# Altium PCB power_interface.PcbDoc
Units mm, origin at the board's own origin, x right, y up, seen from the top; angles counter-clockwise.
Board outline 152.4 x 101.6 mm, 2 copper layers (Top Layer, Bottom Layer), stack 1.57 mm thick; 154 components, 221 nets, 602 pads, 0 vias.
Unrouted connection lines stored in the file: 326.
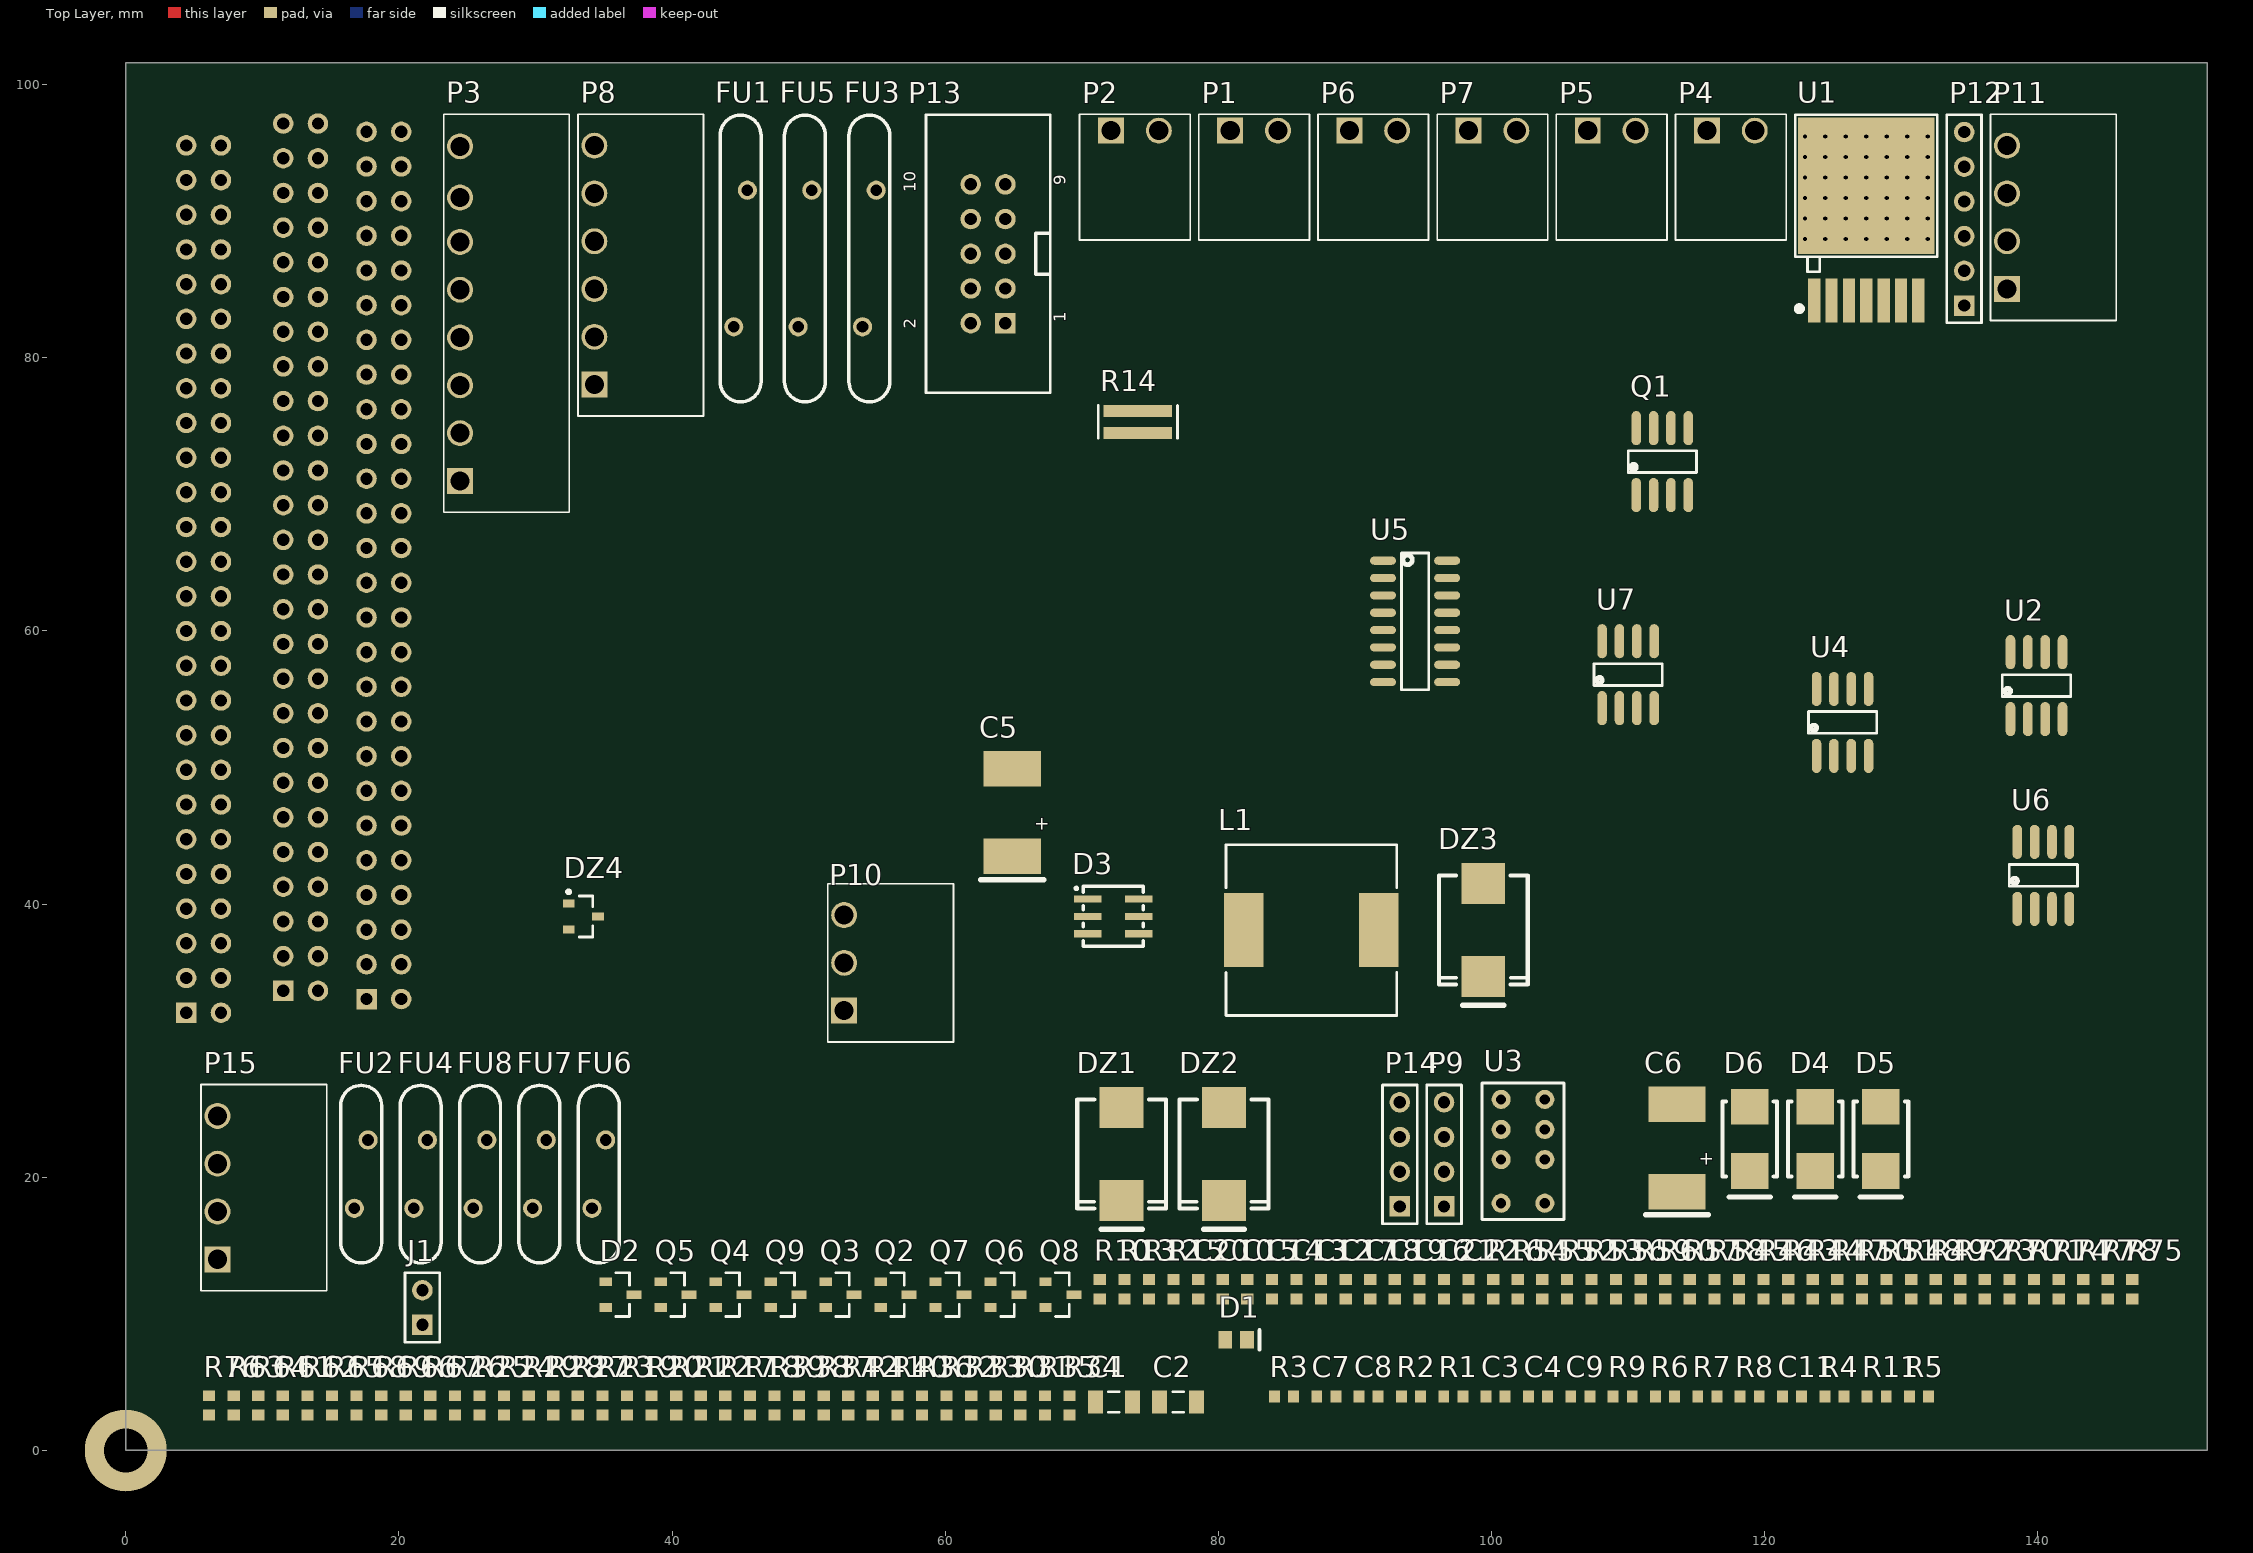
[diagram p0: Top Layer view]
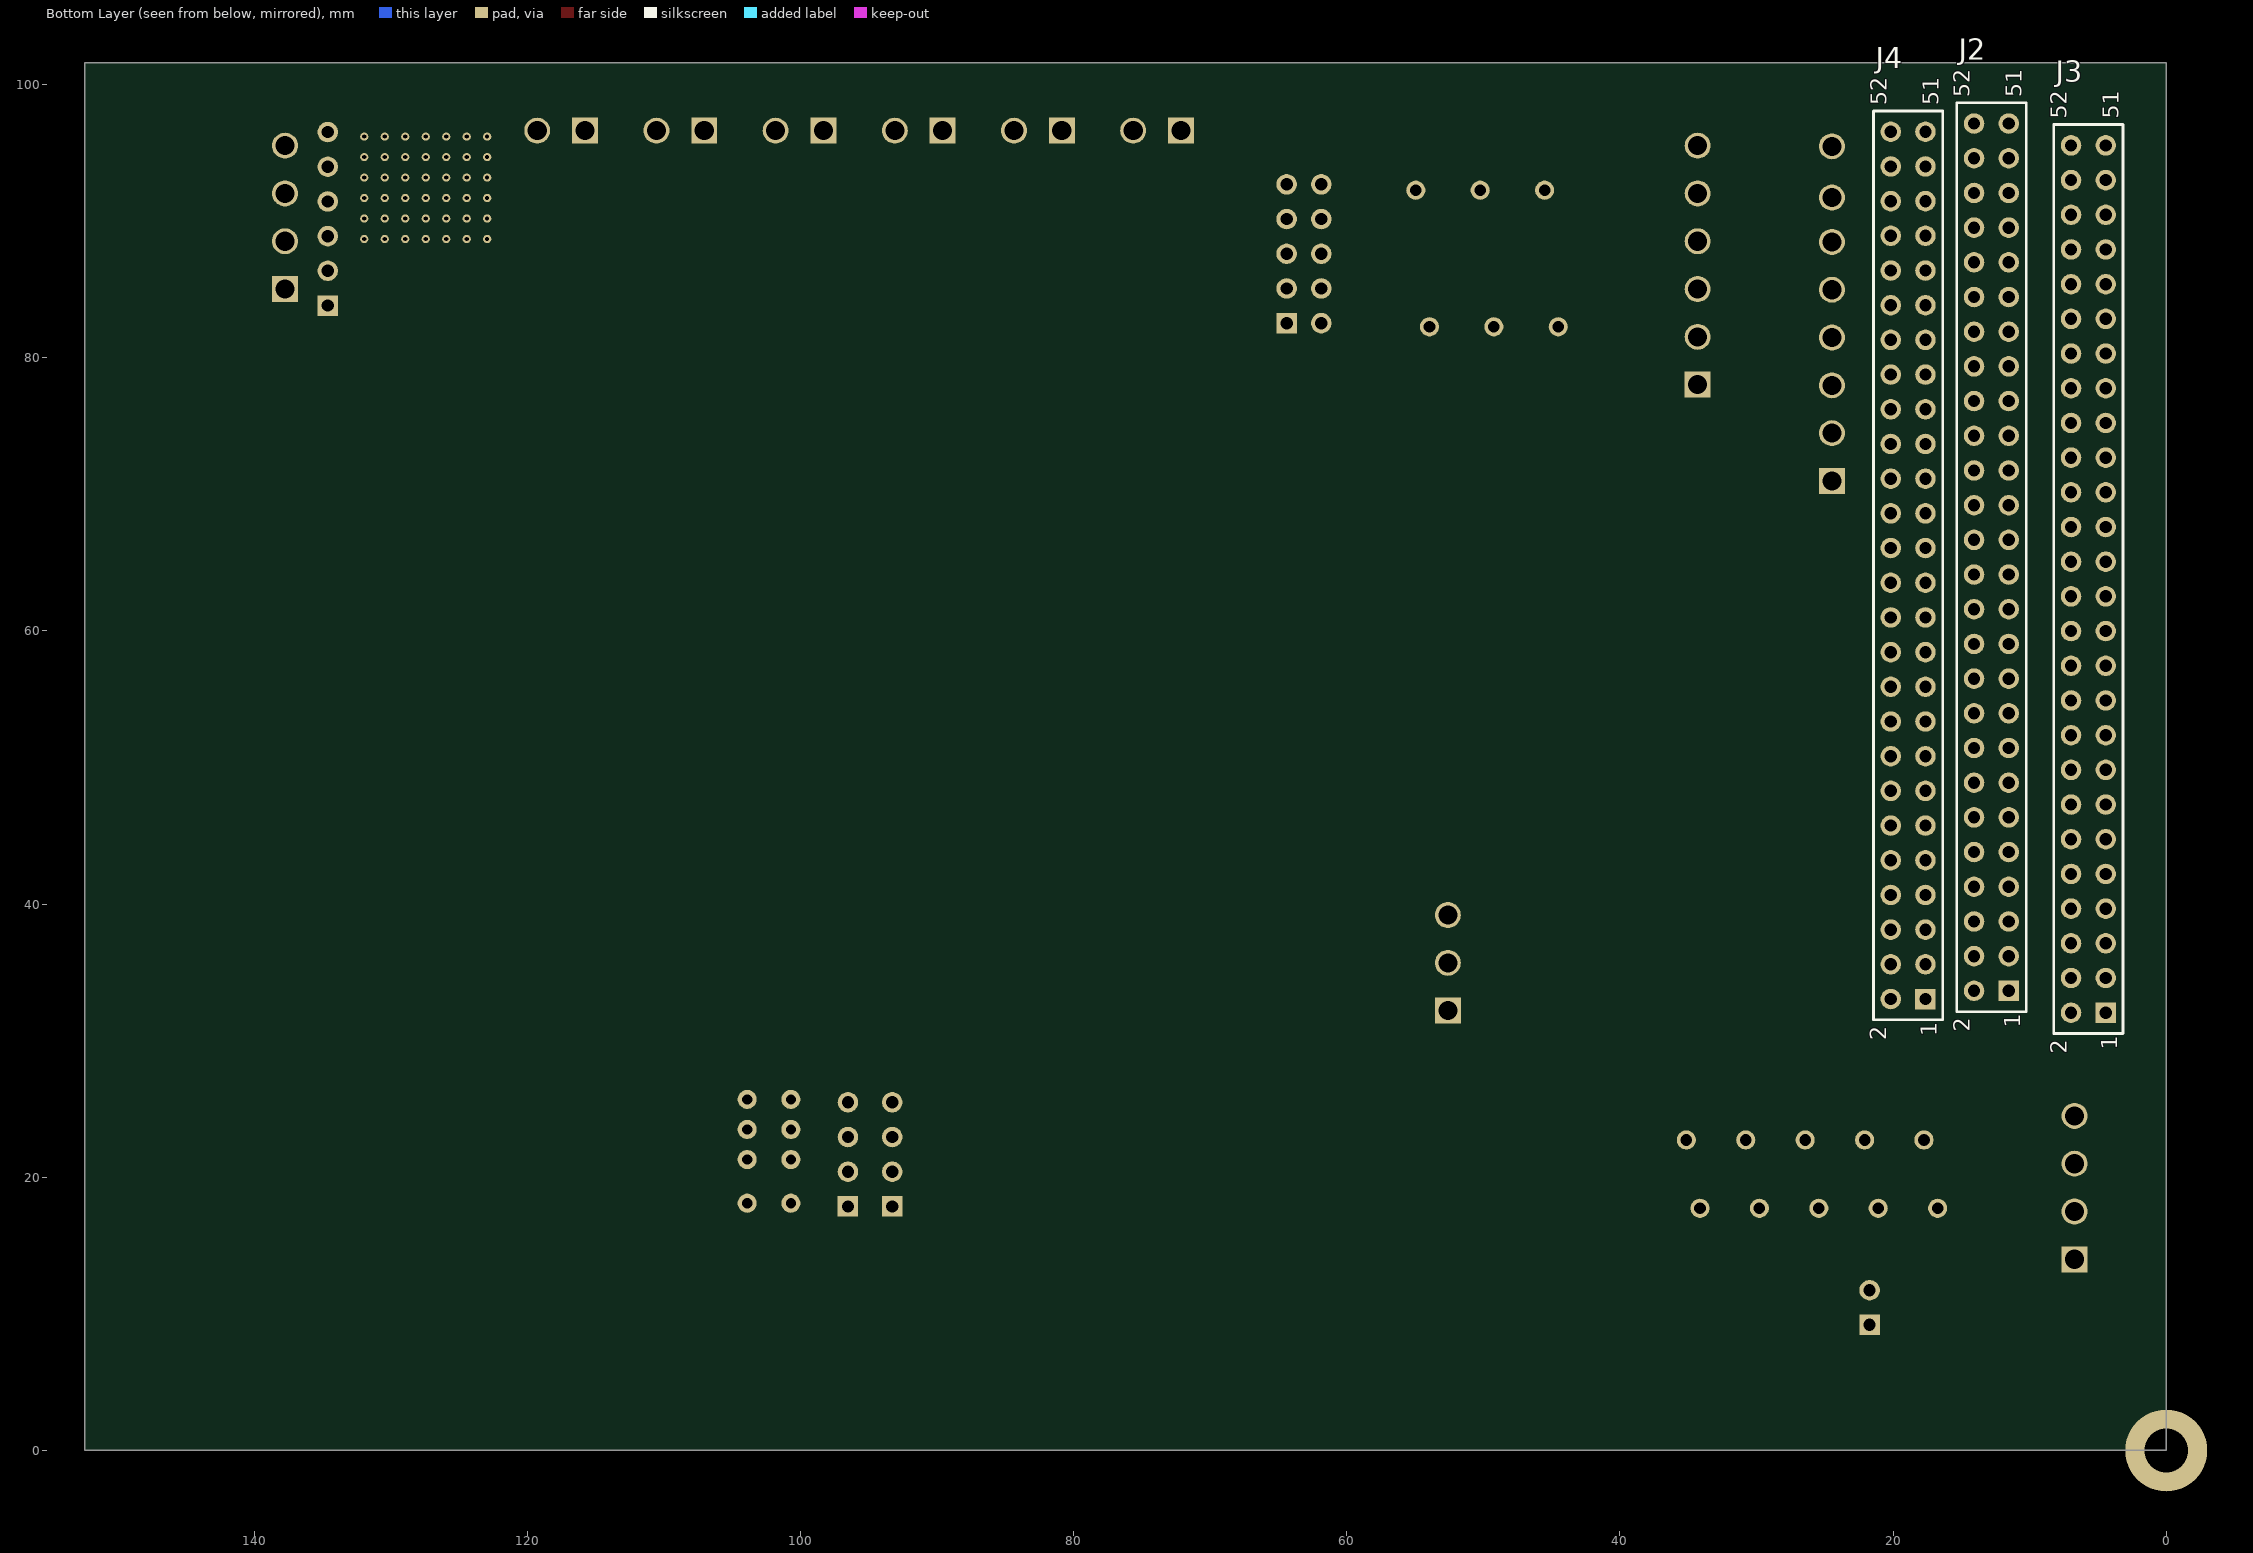
[diagram p1: Bottom Layer view, seen from below]

## Layer stack, top to bottom
Top Solder: solder mask 0.0102, Solder Resist, Dk 3.5
Top Layer: signal copper 0.035
Dielectric1: core 1.5, FR-4, Dk 4.2
Bottom Layer: signal copper 0.035
Bottom Solder: solder mask 0.0102, Solder Resist, Dk 3.5

## Board outline
0,0 152.4,0 152.4,101.6 0,101.6

## Design rules (kind name [scope] priority, off if disabled: settings)
Clearance [All] p1: gap=0.25
ComponentClearance [All] p1: gap=0.25 collisioncheckmode=3 verticalgap=0.25 showdistances=FALSE
HoleSize [All] p1: absolutevalues=TRUE maxlimit=10 minlimit=0.2 maxpercent=80.000 minpercent=20.000
HoleToHoleClearance [All] p1: gap=0.25 allowstackedmicrovias=TRUE
MinimumSolderMaskSliver [All] p1: minsoldermaskwidth=0.15
PlaneClearance [All] p1: clearance=0.5
PlaneConnect PlaneConnect_via [isvia] p1: planeconnectstyle=Direct reliefexpansion=0.508 reliefentries=4 reliefconductorwidth=0.254 reliefairgap=0.254
PlaneConnect [All] p2: planeconnectstyle=Relief reliefexpansion=0.6 reliefentries=4 reliefconductorwidth=0.35 reliefairgap=0.35
PolygonConnect PolygonConnect_via [isvia] p1: connectstyle=Direct reliefconductorwidth=0.254 reliefentries=4 polygonreliefangle="90 Angle" airgapwidth=0.254
PolygonConnect [All] p2: connectstyle=Relief reliefconductorwidth=0.35 reliefentries=4 polygonreliefangle="90 Angle" airgapwidth=0.5
RoutingVias [All] p1: holewidth=0.3 width=0.7 viastyle="Through Hole" minholewidth=0.2 minwidth=0.5 maxholewidth=0.5 maxwidth=1
SilkToSilkClearance [All] p1: silktosilkclearance=0.1
SilkToSolderMaskClearance [IsPad] p1: minsilkscreentomaskgap=0.15 clearancetoexposedcopper=TRUE
SolderMaskExpansion SolderMaskExpansion_via [isVia] p1: expansion=-10
SolderMaskExpansion [All] p2: expansion=0.2
Width [All] p1: maxlimit=5 minlimit=0.15 preferedwidth=0.25
22 further rules are at their usual default settings.

## Classes and differential pairs
component class eva01_connectors: C22 J2 J3 J4 U7
component class interface: C10 C11 C12 C13 C14 C15 C16 C17 C18 C19 C20 C21 D3 D4 D5 D6 FU6 FU7 FU8 J1 P9 P10 P11 P12 P13 P14 P15 Q7 Q8 Q9 R32 R33 R34 R35 R36 R37 R38 R39 R40 R41 R42 R43 R44 R45 R46 R47 R48 R49 R50 R51 R52 R53 R54 R55 R56 R57 R58 R59 R60 R61 R62 R63 R64 R65 R66 R67 R68 R69 R70 R71 R72 R73 R74 R75 R76 R77 R78 U4 U5 U6
component class power: C1 C2 C3 C4 C5 C6 C7 C8 C9 D1 D2 DZ1 DZ2 DZ3 DZ4 FU1 FU2 FU3 FU4 FU5 L1 P1 P2 P3 P4 P5 P6 P7 P8 Q1 Q2 Q3 Q4 Q5 Q6 R1 R2 R3 R4 R5 R6 R7 R8 R9 R10 R11 R12 R13 R14 R15 R16 R17 R18 R19 R20 R21 R22 R23 R24 R25 R26 R27 R28 R29 R30 R31 U1 U2 U3
net class Power: +1.8V +3.3V +5V +24V GND VBATT

## Components (designator, comment, footprint, x,y, rotation, side; value= is the part's Value field where it differs from the comment)
C1 "22uF" 1206_[3216] 72.35,3.552 r0 top
C2 "1uF" 1206_[3216] 77.05,3.552 r0 top
C3 "10nF" 0603_[1608] 100.3,3.952 r0 top
C4 "100nF" 0603_[1608] 103.4,3.952 r0 top
C5 "100uF" [7343]_CAP_TAN 64.9,46.7 r90 top
C6 "100uF" [7343]_CAP_TAN 113.576,22.156 r90 top
C7 "100nF" 0603_[1608] 87.9,3.952 r0 top
C8 "100nF" 0603_[1608] 91,3.952 r0 top
C9 "100nF" 0603_[1608] 106.5,3.952 r0 top
C10 "100nF" 0603_[1608] 80.319,11.802 r90 top
C11 "100nF" 0603_[1608] 122,3.952 r0 top
C12 "470pF" 0603_[1608] 87.519,11.802 r90 top
C13 "100nF" 0603_[1608] 85.719,11.802 r90 top
C14 "100nF" 0603_[1608] 83.919,11.802 r90 top
C15 "100nF" 0603_[1608] 82.119,11.802 r90 top
C16 "100nF" 0603_[1608] 94.719,11.802 r90 top
C17 "100nF" 0603_[1608] 89.319,11.802 r90 top
C18 "100nF" 0603_[1608] 91.119,11.802 r90 top
C19 "100nF" 0603_[1608] 92.919,11.802 r90 top
C20 "100nF" 0603_[1608] 78.519,11.802 r90 top
C21 "100nF" 0603_[1608] 96.519,11.802 r90 top
C22 "100nF" 0603_[1608] 98.319,11.802 r90 top
D1 "PWR_ON" 0805_[2012]_LED 81.3,8.1 r0 top
D2 "BAV99" SOT-23 36.181,11.402 r0 top
D3 "DS9503" TSOC6 72.3,39.1 r0 top
D4 "SMBJ12CA" DO214AA_12 123.71,22.806 r90 top
D5 "SMBJ12CA" DO214AA_12 128.51,22.806 r90 top
D6 "SMBJ12CA" DO214AA_12 118.91,22.806 r90 top
DZ1 "B540C" DO214AB_SMC 72.913,21.706 r90 top
DZ2 "B540C" DO214AB_SMC 80.413,21.706 r90 top
DZ3 "B540C" DO214AB_SMC 99.4,38.1 r90 top
DZ4 "BZX84C3V3" SOT-23_L 33.5,39.1 r0 top
FU1 "RXEF250" "RADIAL 10.2mm 0.4in polyswitch" 45.016,87.269 r90 top
FU2 "RXEF110" "RADIAL 5.08mm 0.2in polyswitch" 17.238,20.229 r90 top
FU3 "RXEF250" "RADIAL 10.2mm 0.4in polyswitch" 54.445,87.269 r90 top
FU4 "RXEF110" "RADIAL 5.08mm 0.2in polyswitch" 21.588,20.229 r90 top
FU5 "RXEF250" "RADIAL 10.2mm 0.4in polyswitch" 49.73,87.269 r90 top
FU6 "RXEF110" "RADIAL 5.08mm 0.2in polyswitch" 34.638,20.229 r90 top
FU7 "RXEF110" "RADIAL 5.08mm 0.2in polyswitch" 30.288,20.229 r90 top
FU8 "RXEF110" "RADIAL 5.08mm 0.2in polyswitch" 25.938,20.229 r90 top
J1 "RS485 TERM" HEADER_1X2_2.54MM_THD 21.72,10.462 r90 top
J2 "TOP" SOCKET_2x26_2.54MM_THD 12.8,65.4 r90 bottom
J3 "LEFT" SOCKET_2x26_2.54MM_THD 5.7,63.8 r90 bottom
J4 "RIGHT" SOCKET_2x26_2.54MM_THD 18.9,64.8 r90 bottom
L1 "12uH - WE 744770112" WE-PD_1280 86.8,38.1 r0 top
P1 "PWR_IN" TBLOCK_1X2_3.5MM_HOR_THD 82.614,96.633 r0 top
P2 "BATTERY" TBLOCK_1X2_3.5MM_HOR_THD 73.887,96.633 r0 top
P3 "AUX_12V" TBLOCK_1X8_3.5MM_HOR_THD 24.481,83.233 r90 top
P4 "INT_SIR" TBLOCK_1X2_3.5MM_HOR_THD 117.522,96.633 r0 top
P5 "BATT_LOAD" TBLOCK_1X2_3.5MM_HOR_THD 108.795,96.633 r0 top
P6 "MODEM_PWR" TBLOCK_1X2_3.5MM_HOR_THD 91.341,96.633 r0 top
P7 "AUX_5V" TBLOCK_1X2_3.5MM_HOR_THD 100.068,96.633 r0 top
P8 "EXT_SIR" TBLOCK_1X6_3.5MM_HOR_THD 34.308,86.782 r90 top
P9 "I2C" HEADER_1X4_2.54MM_THD 96.523,21.676 r90 top
P10 "1-WIRE" TBLOCK_1X3_3.5MM_HOR_THD 52.6,35.7 r90 top
P11 "RS-232" TBLOCK_1X4_3.5MM_HOR_THD 137.739,90.282 r90 top
P12 "SPI" HEADER_1X6_2.54MM_THD 134.606,90.176 r90 top
P13 "SIPO/PISO" HEADER_2X5_2.54MM_THD_BOXED 63.135,87.616 r90 top
P14 "SERIAL" HEADER_1X4_2.54MM_THD 93.283,21.676 r90 top
P15 "RS-485" TBLOCK_1X4_3.5MM_HOR_THD 6.713,19.243 r90 top
Q1 "IRF9362" SOIC8 112.5,72.4 r90 top
Q2 "BC807" SOT-23 56.306,11.402 r0 top
Q3 "BC817" SOT-23 52.281,11.402 r0 top
Q4 "IRLML2502" sot-23 44.231,11.402 r0 top
Q5 "IRLML2502" sot-23 40.206,11.402 r0 top
Q6 "BC817" SOT-23 64.356,11.402 r0 top
Q7 "BSS138" sot-23 60.331,11.402 r0 top
Q8 "BSS138" sot-23 68.381,11.402 r0 top
Q9 "BSS138" sot-23 48.256,11.402 r0 top
R1 "12K 1%" 0603_[1608] 97.2,3.952 r0 top
R2 "1K2 1%" 0603_[1608] 94.1,3.952 r0 top
R3 "680R 1%" 0603_[1608] 84.8,3.952 r0 top
R4 "220K" 0603_[1608] 125.1,3.952 r0 top
R5 "0R" 0603_[1608] 131.3,3.952 r0 top
R6 "NP" 0603_[1608] 112.7,3.952 r0 top
R7 "1M5" 0603_[1608] 115.8,3.952 r0 top
R8 "220K" 0603_[1608] 118.9,3.952 r0 top
R9 "2K7 1%" 0603_[1608] 109.6,3.952 r0 top
R10 "3K3 1%" 0603_[1608] 71.319,11.802 r90 top
R11 "NP" 0603_[1608] 128.2,3.952 r0 top
R12 "4K7" 0603_[1608] 74.919,11.802 r90 top
R13 "0R" 0603_[1608] 73.119,11.802 r90 top
R14 "0R062" 2010_[5025]_ROTATED 74.1,75.3 r180 top
R15 "NP" 0603_[1608] 76.719,11.802 r90 top
R16 "10K" 0603_[1608] 100.119,11.802 r90 top
R17 "100K" 0603_[1608] 43.9,3.302 r90 top
R18 "10K" 0603_[1608] 45.7,3.302 r90 top
R19 "10K" 0603_[1608] 36.7,3.302 r90 top
R20 "3K3" 0603_[1608] 38.5,3.302 r90 top
R21 "3K3" 0603_[1608] 40.3,3.302 r90 top
R22 "4K7" 0603_[1608] 42.1,3.302 r90 top
R23 "6K8" 0603_[1608] 34.9,3.302 r90 top
R24 "10K 1%" 0603_[1608] 27.7,3.302 r90 top
R25 "10K 1%" 0603_[1608] 25.9,3.302 r90 top
R26 "1K" 0603_[1608] 24.1,3.302 r90 top
R27 "1K" 0603_[1608] 33.1,3.302 r90 top
R28 "10K" 0603_[1608] 31.3,3.302 r90 top
R29 "10K" 0603_[1608] 29.5,3.302 r90 top
R30 "10K" 0603_[1608] 63.7,3.302 r90 top
R31 "4K7" 0603_[1608] 65.5,3.302 r90 top
R32 "4K7" 0603_[1608] 60.1,3.302 r90 top
R33 "4K7" 0603_[1608] 61.9,3.302 r90 top
R34 "4K7" 0603_[1608] 69.1,3.302 r90 top
R35 "4K7" 0603_[1608] 67.3,3.302 r90 top
R36 "NP" 0603_[1608] 58.3,3.302 r90 top
R37 "22R" 0603_[1608] 51.1,3.302 r90 top
R38 "22R" 0603_[1608] 49.3,3.302 r90 top
R39 "22R" 0603_[1608] 47.5,3.302 r90 top
R40 "22R" 0603_[1608] 56.5,3.302 r90 top
R41 "68R" 0603_[1608] 54.7,3.302 r90 top
R42 "22R" 0603_[1608] 52.9,3.302 r90 top
R43 "4K7" 0603_[1608] 121.719,11.802 r90 top
R44 "4K7" 0603_[1608] 123.519,11.802 r90 top
R45 "22R" 0603_[1608] 118.119,11.802 r90 top
R46 "22R" 0603_[1608] 119.919,11.802 r90 top
R47 "22R" 0603_[1608] 125.319,11.802 r90 top
R48 "22R" 0603_[1608] 130.719,11.802 r90 top
R49 "0R" 0603_[1608] 132.519,11.802 r90 top
R50 "22R" 0603_[1608] 127.119,11.802 r90 top
R51 "22R" 0603_[1608] 128.919,11.802 r90 top
R52 "22R" 0603_[1608] 105.519,11.802 r90 top
R53 "22R" 0603_[1608] 107.319,11.802 r90 top
R54 "22R" 0603_[1608] 101.919,11.802 r90 top
R55 "NP" 0603_[1608] 103.719,11.802 r90 top
R56 "22R" 0603_[1608] 109.119,11.802 r90 top
R57 "22R" 0603_[1608] 114.519,11.802 r90 top
R58 "22R" 0603_[1608] 116.319,11.802 r90 top
R59 "NP" 0603_[1608] 110.919,11.802 r90 top
R60 "22R" 0603_[1608] 112.719,11.802 r90 top
R61 "22R" 0603_[1608] 11.5,3.302 r90 top
R62 "NP" 0603_[1608] 13.3,3.302 r90 top
R63 "22R" 0603_[1608] 7.9,3.302 r90 top
R64 "22R" 0603_[1608] 9.7,3.302 r90 top
R65 "22R" 0603_[1608] 15.1,3.302 r90 top
R66 "0R" 0603_[1608] 20.5,3.302 r90 top
R67 "22R" 0603_[1608] 22.3,3.302 r90 top
R68 "22R" 0603_[1608] 16.9,3.302 r90 top
R69 "10K" 0603_[1608] 18.7,3.302 r90 top
R70 "10K" 0603_[1608] 137.919,11.802 r90 top
R71 "10K" 0603_[1608] 139.719,11.802 r90 top
R72 "10K" 0603_[1608] 134.319,11.802 r90 top
R73 "120R" 0603_[1608] 136.119,11.802 r90 top
R74 "22R" 0603_[1608] 141.519,11.802 r90 top
R75 "NP" 0603_[1608] 146.919,11.802 r90 top
R76 "22R" 0603_[1608] 6.1,3.302 r90 top
R77 "10K" 0603_[1608] 143.319,11.802 r90 top
R78 "10K" 0603_[1608] 145.119,11.802 r90 top
U1 "LM22677TJ-5.0" TO-263-7 127.436,90.196 r90 top
U2 "DS2438" SOIC8 139.9,56 r90 top
U3 "IM06TS" RELAYS_DPST_THD_6x10_3.2mm 102.3,21.9 r90 top
U4 "DS2482-100" SOIC8 125.7,53.3 r90 top
U5 "ST3232EBDR" SOIC16 94.4,60.7 r0 top
U6 "SN65HVD12" SOIC8 140.4,42.1 r90 top
U7 "24C128" SOIC8 110,56.8 r90 top

## Footprints (in the part's own frame and the unit in brackets; to place one, negate y for a bottom-side part, rotate by r counter-clockwise, add the part's x,y. Pads: shape width x height; smd on the part's side, far side on the other; paste and mask are expansions set on the pad)
0603_[1608] [mm] "Chip Capacitor, Body 1.6x0.8mm, IPC High Density"
  rect 0.8x0.9 smd: 1(-0.7,0) 2(0.7,0)
  body extent -0.75,-0.4 0.75,0.4, height 0.67
0805_[2012]_LED [mm] "SMD led 0805 size"
  rect 1x1.3 smd: 1(-0.8,0) 2(0.8,0)
  silkscreen extent 1.7,-0.7 1.7,0.7, body extent -1.01,-0.63 1.01,0.62, height 1.1
1206_[3216] [mm] "Chip Capacitor, Body 3.2x1.6mm, IPC High Density"
  rect 1.1x1.7 smd: 1(-1.35,0) 2(1.35,0)
  silkscreen extent -0.4,-0.75 0.4,0.75, body extent -1.7,-0.9 1.7,0.9, height 1.3
2010_[5025]_ROTATED [mm] "Chip Resistor, Body 5.0x2.5mm, IPC High Density"
  rect 5x0.9 smd: 1(0,0.8) 2(0,-0.8)
  silkscreen extent -2.9,-1.2 2.9,1.2, body extent -2.58,-1.32 2.58,1.33, height 0.9
[7343]_CAP_TAN [mm] "Capacitor, SM Tantalum; Body 7.3 x 4.3 mm (LxW typ)"
  rect 2.6x4.2 smd: 1(-3.2,0) 2(3.2,0)
  silkscreen extent -4.9,-2.3 -4.9,2.3, body extent -3.8,-2.3 3.8,2.3, height 3.1
DO214AA_12 [mil]
  rect 103x108 smd: 1(-92.5,0) 2(92.5,0)
  silkscreen extent -167,-79 108,79, body extent -110,-78 110,78, height 106
DO214AB_SMC [mm]
  rect 3x3.2 smd: 1(-3.4,0) 2(3.4,0)
  silkscreen extent -5.5,-3.25 4,3.25, body extent -4.1,-3.12 4.05,3.13, height 2.65
HEADER_1X2_2.54MM_THD [mm] "Connector; Header; 2 Position"
  rect 1.5x1.5 hole 0.9: 1(-1.27,0)
  round 1.5 hole 0.9: 2(1.27,0)
  silkscreen extent -2.54,-1.27 2.54,1.27, body extent -2.54,-1.25 2.44,1.25, height 8.2
HEADER_1X4_2.54MM_THD [mm] "Connector; Header; 4 Position"
  rect 1.5x1.5 hole 0.9: 1(-3.81,0)
  round 1.5 hole 0.9: 2(-1.27,0) 3(1.27,0) 4(3.81,0)
  silkscreen extent -5.08,-1.27 5.08,1.27, body extent -5.08,-1.25 4.98,1.25, height 8.2
HEADER_1X6_2.54MM_THD [mm] "Connector; Header; 6 Position"
  rect 1.5x1.5 hole 0.9: 1(-6.35,0)
  round 1.5 hole 0.9: 2(-3.81,0) 3(-1.27,0) 4(1.27,0) 5(3.81,0) 6(6.35,0)
  silkscreen extent -7.62,-1.27 7.62,1.27, body extent -7.62,-1.27 7.62,1.27, height 8.47
HEADER_2X5_2.54MM_THD_BOXED [mm] "pin header 2.54mm 2row 10pin boxed"
  rect 1.5x1.5 hole 0.9: 1(-5.08,-1.27)
  round 1.5 hole 0.9: 2(-5.08,1.27) 3(-2.54,-1.27) 4(-2.54,1.27) 5(0,-1.27) 6(0,1.27) 7(2.54,-1.27) 8(2.54,1.27) 9(5.08,-1.27) 10(5.08,1.27)
  silkscreen extent -10.18,-4.55 10.18,4.55, body extent -10.18,-4.4 10.18,4.65, height 8.9
"RADIAL 5.08mm 0.2in polyswitch" [mm]
  round 1.4 hole 0.85: 1(-2.5,0.5) 2(2.5,-0.5)
  silkscreen extent -6.5,-1.5 6.5,1.5, body extent -3.75,-1.92 3.74,1.93, height 10.74
"RADIAL 10.2mm 0.4in polyswitch" [mm]
  round 1.4 hole 0.85: 1(-5,0.5) 2(5,-0.5)
  silkscreen extent -10.5,-1.5 10.5,1.5, body extent -6.24,-2.11 6.23,2.11, height 16.24
RELAYS_DPST_THD_6x10_3.2mm [mm] "Relays DPST thd 6x10x10mm pin space 3.2mm"
  round 1.4 hole 0.75 paste+0: 1(-3.8,-1.6) 2(-0.6,-1.6) 3(1.6,-1.6) 4(3.8,-1.6) 5(3.8,1.6) 6(1.6,1.6) 7(-0.6,1.6) 8(-3.8,1.6)
  silkscreen extent -5,-3 5,3, body extent -5,-3 5,3, height 6
SOCKET_2x26_2.54MM_THD [mm]
  rect 1.5x1.5 hole 0.9: 1(-31.75,-1.27)
  round 1.5 hole 0.9: 2(-31.75,1.27) 3(-29.21,-1.27) 4(-29.21,1.27) 5(-26.67,-1.27) 6(-26.67,1.27) 7(-24.13,-1.27) 8(-24.13,1.27) 9(-21.59,-1.27) 10(-21.59,1.27) 11(-19.05,-1.27) 12(-19.05,1.27) 13(-16.51,-1.27) 14(-16.51,1.27) 15(-13.97,-1.27) 16(-13.97,1.27) 17(-11.43,-1.27) 18(-11.43,1.27) 19(-8.89,-1.27) 20(-8.89,1.27) 21(-6.35,-1.27) 22(-6.35,1.27) 23(-3.81,-1.27) 24(-3.81,1.27) 25(-1.27,-1.27) 26(-1.27,1.27) 27(1.27,-1.27) 28(1.27,1.27) 29(3.81,-1.27) 30(3.81,1.27) 31(6.35,-1.27) 32(6.35,1.27) 33(8.89,-1.27) 34(8.89,1.27) 35(11.43,-1.27) 36(11.43,1.27) 37(13.97,-1.27) 38(13.97,1.27) 39(16.51,-1.27) 40(16.51,1.27) 41(19.05,-1.27) 42(19.05,1.27) 43(21.59,-1.27) 44(21.59,1.27) 45(24.13,-1.27) 46(24.13,1.27) 47(26.67,-1.27) 48(26.67,1.27) 49(29.21,-1.27) 50(29.21,1.27) 51(31.75,-1.27) 52(31.75,1.27)
  silkscreen extent -33.27,-2.54 33.27,2.54, body extent -33.26,-2.54 33.26,2.54, height 8.45
SOIC8 [mm] "SOIC, 8-Leads, Body 4.9x3.8mm, Pitch 1.27mm, IPC Low Density"
  oval 2.5x0.7 smd: 1(-2.45,1.905) 2(-2.45,0.635) 3(-2.45,-0.635) 4(-2.45,-1.905) 5(2.45,-1.905) 6(2.45,-0.635) 7(2.45,0.635) 8(2.45,1.905)
  silkscreen extent -0.8,-2.5 0.8,2.5, body extent -2,-2.5 2,2.5, height 1.75
SOIC16 [mm] "SOIC, 16-Leads, Body 9.9x3.9mm, Pitch 1.27mm, IPC High Density"
  oval 1.9x0.6 smd: 1(-2.35,4.445) 2(-2.35,3.175) 3(-2.35,1.905) 4(-2.35,0.635) 5(-2.35,-0.635) 6(-2.35,-1.905) 7(-2.35,-3.175) 8(-2.35,-4.445) 9(2.35,-4.445) 10(2.35,-3.175) 11(2.35,-1.905) 12(2.35,-0.635) 13(2.35,0.635) 14(2.35,1.905) 15(2.35,3.175) 16(2.35,4.445)
  silkscreen extent -1,-5 1,5, body extent -2,-5 2,5, height 1.91
SOT-23 [mm] "SOT23, 3-Leads, Body 2.9x1.3mm, Pitch 0.95mm, Lead Span 2.5mm, IPC High Density"
  rect 0.9x0.65 smd: 1(-1.037,0.95) 2(-1.037,-0.95)
  rect 1.1x0.65 smd: 3(1.037,0)
  silkscreen extent -0.3,-1.6 0.7,1.6, body extent -1.2,-1.52 1.2,1.52, height 1.22
sot-23 [mm] "SOT23, 3-Leads, Body 2.9x1.3mm, Pitch 0.95mm, Lead Span 2.5mm, IPC High Density"
  rect 0.9x0.65 smd: 1(-1.038,0.95) 2(-1.038,-0.95)
  rect 1.1x0.65 smd: 3(1.038,0)
  silkscreen extent -0.3,-1.6 0.7,1.6, body extent -1.2,-1.52 1.2,1.52, height 1.22
SOT-23_L [mm] "SOT23, 3-Leads, Body 2.9x1.3mm, Pitch 0.95mm, Lead Span 2.5mm, IPC High Density"
  rect 0.85x0.6 smd: 1(-1.075,0.95) 2(-1.075,-0.95) 3(1.075,0)
  silkscreen extent -1.2,-1.5 0.7,1.92, body extent -0.7,-1.5 0.7,1.5, height 1.1
TBLOCK_1X2_3.5MM_HOR_THD [mm] "3,50mm - PCB Horizontal - 02p"
  rect 1.9x1.9 hole 1.4: 1(-1.75,0)
  round 1.9 hole 1.4: 2(1.75,0)
  silkscreen extent -4.05,-8 4.05,1.2, body extent -4.05,-16.8 4.05,1.2, height 7.98
TBLOCK_1X3_3.5MM_HOR_THD [mm] "3,50mm - PCB Horizontal - 03p"
  rect 1.9x1.9 hole 1.4: 1(-3.5,0)
  round 1.9 hole 1.4: 2(0,0) 3(3.5,0)
  silkscreen extent -5.8,-8 5.8,1.2, body extent -6,-8 6,1.2, height 7.31
TBLOCK_1X4_3.5MM_HOR_THD [mm] "3,50mm - PCB Horizontal - 04p"
  rect 1.9x1.9 hole 1.4: 1(-5.25,0)
  round 1.9 hole 1.4: 2(-1.75,0) 3(1.75,0) 4(5.25,0)
  silkscreen extent -7.55,-8 7.55,1.2, body extent -7.55,-8.1 7.55,1.1, height 7.21
TBLOCK_1X6_3.5MM_HOR_THD [mm] "3,50mm - PCB Horizontal - 06p"
  rect 1.9x1.9 hole 1.4: 1(-8.75,0)
  round 1.9 hole 1.4: 2(-5.25,0) 3(-1.75,0) 4(1.75,0) 5(5.25,0) 6(8.75,0)
  silkscreen extent -11.05,-8 11.05,1.2, body extent -11.05,-8.1 11.05,1.1, height 7.21
TBLOCK_1X8_3.5MM_HOR_THD [mm] "3,50mm - PCB Horizontal - 08p"
  rect 1.9x1.9 hole 1.4: 1(-12.25,0)
  round 1.9 hole 1.4: 2(-8.75,0) 3(-5.25,0) 4(-1.75,0) 5(1.75,0) 6(5.25,0) 7(8.5,0) 8(12.25,0)
  silkscreen extent -14.55,-8 14.6,1.2, body extent -14.55,-8 14.55,1.2, height 7.21
TO-263-7 [mm] "pitch 1.27mm 7 pin"
  rect 3.2x0.9 smd: 1(-6,3.81) 2(-6,2.54) 3(-6,1.27) 4(-6,0) 5(-6,-1.27) 6(-6,-2.54) 7(-6,-3.81)
  round 0.6 hole 0.3 paste-10 mask-10: 8(-1.5,4.5) 8(-1.5,1.5) 8(-1.5,3) 8(-1.5,0) 8(-1.5,-3) 8(-1.5,-1.5) 8(-1.5,-4.5) 8(0,4.5) 8(0,3) 8(0,1.5) 8(0,0) 8(0,-1.5) 8(0,-3) 8(0,-4.5) 8(1.5,4.5) 8(1.5,1.5) 8(1.5,3) 8(1.5,0) 8(1.5,-3) 8(1.5,-1.5) 8(1.5,-4.5) 8(3,3) 8(3,4.5) 8(3,-1.5) 8(3,0) 8(3,1.5) 8(3,-4.5) 8(3,-3) 8(4.5,-4.5) 8(4.5,-3) 8(4.5,-1.5) 8(4.5,0) 8(4.5,1.5) 8(4.5,3) 8(4.5,4.5) 8(6,-4.5) 8(6,-3) 8(6,-1.5) 8(6,0) 8(6,1.5) 8(6,3) 8(6,4.5)
  rect 10x10 smd paste-10 mask-10: 8(2.4,0.01)
  silkscreen extent -6.8,-5.2 7.6,5.2, body extent -6.61,-5.06 7.41,5.1, height 2.1
TSOC6 [mm] "TSOC, 6-Leads, Body 3.76x3.94mm, Pitch 1.27mm, Lead Span 0.81mm"
  rect 2x0.53 smd: 1(-1.86,1.27) 2(-1.86,0) 3(-1.86,-1.27) 4(1.86,-1.27) 5(1.86,0) 6(1.86,1.27)
  silkscreen extent -2.77,-2.2 2.2,2.2, body extent -2.22,-2.05 2.22,2.05, height 1.51
WE-PD_1280 [mm] "SMD Inductor, 2-Leads, Body 12,0x12,0mm"
  rect 2.9x5.4 smd: 1(-4.95,0) 2(4.95,0)
  silkscreen extent -6.25,-6.25 6.25,6.25, body extent -6,-6 6,6, height 7.99

## Part data
C1 C2: library part "Cap Pol1", "Ceramic X7R 50V"
C3 C4 C7 C8 C9 C10 C11 C12 C13 C14 C15 C16 C17 C18 C19 C20 C21 C22: library part Cap, "Ceramic X7R 50V"
C5 C6: library part "Cap Pol1", "Tantalum 25V T491X107K025AT"
D1: library part LED, "Multicolor LED"
D2: "SOT23"
D3: "ESD Protection Diode with Resistors"
D4 D5 D6: library part "TVS bi", "TVS bidirectional"
DZ1 DZ2 DZ3: library part "D Schottky", "Diode Schottky (SSC54)"
DZ4: library part ZENER_BZX, "Zener 0.35W"
FU1 FU2 FU3 FU4 FU5 FU6 FU7 FU8: library part FuseAutoReset, "Fuse autoreset"
J1: library part "Header 2", "Pin Header, 2.54mm, 1x2, 2pin"
J2 J3 J4: library part "Header 26x2", "Socket Header, 52 pin, 26x2, 2.54mm, H=8.5mm"
L1: library part Inductor, "SMD Shielded Tiny Power Inductor"
P1 P2 P4 P5 P6 P7: library part "Header 2", "Header, 2-Pin"
P3: library part "Header 8", "Header, 8-Pin"
P8 P12: library part "Header 6", "Header, 6-Pin"
P9 P11 P14 P15: library part "Header 4", "Header, 4-Pin"
P10: library part "Header 3", "Header, 3-Pin"
P13: library part "Header 5X2", "Header, 5-Pin, Dual row"
Q1: library part "MOSFET-P dual", "Dual channel P-MOS in same package"
Q2: "PNP Trasistor"
Q3 Q6: "NPN Transistor"
Q4 Q5 Q7 Q8 Q9: library part "MOSFET-N 3pin", "N MOS"
R1 R2 R3 R4 R5 R6 R7 R8 R9 R10 R11 R12 R13 R14 R15 R16 R17 R18 R19 R20 R21 R22 R23 R24 R25 R26 R27 R28 R29 R30 R31 R32 R33 R34 R35 R36 R37 R38 R39 R40 R41 R42 R43 R44 R45 R46 R47 R48 R49 R50 R51 R52 R53 R54 R55 R56 R57 R58 R59 R60 R61 R62 R63 R64 R65 R66 R67 R68 R69 R70 R71 R72 R73 R74 R75 R76 R77 R78: library part Res1, "Resistor"
U1: library part LM22670TJ-ADJ, "Switching regulator."
U2: "Smart Battery Monitor"
U3: library part "RELAY DPST", "Relay DPST"
U4: "Single-Channel 1-Wire Master"
U5: library part ST3232CDR, "3 to 5.5 V, low power, up to 400 kbps RS-232 driver"
U6: "3.3V to RS485 interface"
U7: library part EEPROM-SOIC8, "EEPROM"

## Free pads (board coordinates)
  round 6 hole 3.2: Hole(0,0)

## Nets (pads, with @x,y where several pads share a name; then routed paths per layer and width w, separated by ;. In a path a pad name is that pad's centre, name@x,y a point inside that pad or via, vN(x,y) a via of type N, cw(c..) or ccw(c..) an arc to the next point about the centre after c; other vN are vias at no path point)
+1.8V: J2.3 J4.49
+3.3V: C11.2 C13.2 C18.2 C19.2 C20.2 C22.2 J2.1 J4.4 P9.1 P12.1 P13.1 P13.2 P14.1 Q7.1 Q8.1 Q9.1 R32.2 R33.2 R43.2 R69.2 U5.16 U6.8 U7.8
+5V: C10.2 FU4.1 FU6.1 J2.4 J3.4 J3.49 J4.2 R6.1 R34.2 R35.2 R44.2 U4.1
+12V: D2.3 DZ1.1 DZ2.1 FU1.1 FU2.1 FU3.1 FU5.1 FU7.1 FU8.1 P13.3 P13.4 U3.1
+24V: J2.2 J3.51
GND: C1.2 C2.2 C4.1 C5.2 C6.2 C7.1 C9.1 C10.1 C11.1 C12.2 C13.1 C15.1 C17.1 C18.1 C19.1 C20.1 C22.1 D1.1 D3.5 D4.2 D6.2 DZ3.2 DZ4.1 J2.6 J2.13 J2.14 J2.23 J2.24 J2.33 J2.34 J2.43 J2.44 J3.1 J3.37 J3.43 J4.1 J4.51 P1.1 P3.5 P3.6 P3.7 P3.8 P6.2 P7.2 P8.6 P9.4 P11.4 P12.6 P13.9 P13.10 P14.4 P15.4 Q3.2 Q4.2 Q5.2 Q6.2 R3.2 R7.1 R8.1 R10.1 R14.2 R15.2 R17.1 R18.1 R22.1 R25.1 R28.1 R29.1 R31.1 R70.1 R71.1 R72.1 R77.1 R78.1 U1.4 U1.8 U2.1 U4.3 U4.7 U4.8 U5.15 U6.5 U7.1 U7.2 U7.3 U7.4 U7.7
NetC1_1: C1.1 C2.1 P1.2 R4.1 R20.2 R21.2 R23.2 R24.2 U1.2
NetC3_1: C3.1 U1.3
NetC3_2: C3.2 DZ3.1 L1.1 U1.1
NetC4_2: C4.2 C5.1 C6.1 DZ1.2 L1.2 Q1.7 Q1.8 R1.1 R2.1
NetC7_2: C7.2 R5.1 R6.2 U2.5
NetC8_1: C8.1 R17.2 U2.3
NetC8_2: C8.2 R13.2 U2.2
NetC9_2: C9.2 R11.1 R24.1 R25.2 U2.4
NetC12_1: C12.1 R36.2 R41.1 R49.2
NetC14_1: C14.1 U5.1
NetC14_2: C14.2 U5.3
NetC15_2: C15.2 U5.2
NetC16_1: C16.1 U5.5
NetC16_2: C16.2 U5.4
NetC17_2: C17.2 U5.6
NetC21_1: C21.1 J1.1
NetC21_2: C21.2 D4.1 D5.1 P15.3 R74.2
NetD1_2: D1.2 R20.1 R21.1
NetD2_1: D2.1 Q6.3 U3.8
NetD3_1: D3.1 P10.2 U2.8
NetD3_2: D3.2 P10.3
NetD3_6: D3.6 R41.2
NetD5_2: D5.2 D6.1 P15.2 R73.2 R76.2
NetDZ4_3: DZ4.3 R23.1 R63.2
NetFU1_2: FU1.2 P3.1 P3.2 P3.3 P3.4
NetFU2_2: FU2.2 P4.1
NetFU3_2: FU3.2 P6.1
NetFU4_2: FU4.2 P7.1
NetFU5_2: FU5.2 P8.1
NetFU6_2: FU6.2 P10.1
NetFU7_2: FU7.2 P11.1
NetFU8_2: FU8.2 P15.1
NetJ1_2: J1.2 R73.1
NetJ2_5: J2.5 J3.44
NetJ2_7: J2.7
NetJ2_8: J2.8
NetJ2_9: J2.9
NetJ2_10: J2.10
NetJ2_11: J2.11
NetJ2_12: J2.12
NetJ2_15: J2.15
NetJ2_16: J2.16
NetJ2_17: J2.17
NetJ2_18: J2.18
NetJ2_19: J2.19
NetJ2_20: J2.20
NetJ2_21: J2.21
NetJ2_22: J2.22
NetJ2_25: J2.25
NetJ2_26: J2.26
NetJ2_27: J2.27
NetJ2_28: J2.28
NetJ2_29: J2.29
NetJ2_30: J2.30
NetJ2_31: J2.31
NetJ2_32: J2.32
NetJ2_35: J2.35
NetJ2_36: J2.36
NetJ2_37: J2.37
NetJ2_38: J2.38
NetJ2_39: J2.39
NetJ2_40: J2.40
NetJ2_41: J2.41
NetJ2_42: J2.42
NetJ2_45: J2.45 R54.1
NetJ2_46: J2.46
NetJ2_47: J2.47 R56.1
NetJ2_48: J2.48
NetJ2_49: J2.49 R57.1
NetJ2_50: J2.50
NetJ2_51: J2.51 R58.1
NetJ2_52: J2.52
NetJ3_3: J3.3
NetJ3_5: J3.5
NetJ3_6: J3.6
NetJ3_7: J3.7
NetJ3_8: J3.8
NetJ3_9: J3.9
NetJ3_10: J3.10
NetJ3_11: J3.11
NetJ3_12: J3.12 R45.1
NetJ3_13: J3.13
NetJ3_14: J3.14 R46.1
NetJ3_15: J3.15
NetJ3_16: J3.16
NetJ3_17: J3.17
NetJ3_18: J3.18
NetJ3_19: J3.19
NetJ3_20: J3.20
NetJ3_21: J3.21
NetJ3_22: J3.22 R40.1
NetJ3_23: J3.23
NetJ3_24: J3.24 R42.1
NetJ3_25: J3.25 R39.1
NetJ3_26: J3.26
NetJ3_27: J3.27
NetJ3_28: J3.28 R37.1
NetJ3_29: J3.29
NetJ3_30: J3.30 R38.1
NetJ3_31: J3.31
NetJ3_32: J3.32
NetJ3_33: J3.33
NetJ3_34: J3.34
NetJ3_35: J3.35
NetJ3_36: J3.36
NetJ3_38: J3.38
NetJ3_39: J3.39
NetJ3_40: J3.40
NetJ3_41: J3.41
NetJ3_42: J3.42
NetJ3_45: J3.45 U7.6
NetJ3_46: J3.46
NetJ3_47: J3.47 U7.5
NetJ3_48: J3.48 R52.1
NetJ3_50: J3.50 R50.1
NetJ3_52: J3.52
NetJ4_3: J4.3
NetJ4_5: J4.5
NetJ4_6: J4.6
NetJ4_7: J4.7
NetJ4_8: J4.8
NetJ4_9: J4.9 R65.1
NetJ4_10: J4.10
NetJ4_11: J4.11 R63.1
NetJ4_12: J4.12 R61.1
NetJ4_13: J4.13 R60.1
NetJ4_14: J4.14
NetJ4_15: J4.15
NetJ4_16: J4.16
NetJ4_17: J4.17 R47.1
NetJ4_18: J4.18
NetJ4_19: J4.19
NetJ4_20: J4.20
NetJ4_21: J4.21
NetJ4_22: J4.22
NetJ4_23: J4.23 R48.1
NetJ4_24: J4.24
NetJ4_25: J4.25
NetJ4_26: J4.26
NetJ4_27: J4.27 R64.1
NetJ4_28: J4.28 R66.1
NetJ4_29: J4.29
NetJ4_30: J4.30
NetJ4_31: J4.31
NetJ4_32: J4.32
NetJ4_33: J4.33
NetJ4_34: J4.34
NetJ4_35: J4.35
NetJ4_36: J4.36
NetJ4_37: J4.37
NetJ4_38: J4.38
NetJ4_39: J4.39
NetJ4_40: J4.40 R53.1
NetJ4_41: J4.41
NetJ4_42: J4.42
NetJ4_43: J4.43 R51.1
NetJ4_44: J4.44
NetJ4_45: J4.45
NetJ4_46: J4.46
NetJ4_47: J4.47
NetJ4_48: J4.48
NetJ4_50: J4.50
NetJ4_52: J4.52
NetP2_1: P2.1 R13.1 R14.1 R15.1
NetP4_2: P4.2 Q4.3
NetP5_2: P5.2 Q5.3
NetP8_2: P8.2 U3.3 U3.6
NetP8_3: P8.3 U3.2 U3.7
NetP8_4: P8.4 U3.4 U3.5
NetP9_2: P9.2 Q7.2 R33.1 R37.2
NetP9_3: P9.3 Q8.2 R32.1 R38.2
NetP11_2: P11.2 R68.2
NetP11_3: P11.3 R67.2
NetP12_2: P12.2 R50.2
NetP12_3: P12.3 R51.2
NetP12_4: P12.4 R52.2
NetP12_5: P12.5 R53.2
NetP13_5: P13.5 R56.2 R71.2
NetP13_6: P13.6 R54.2 R72.2
NetP13_7: P13.7 R57.2 R70.2
NetP13_8: P13.8 R58.2 R69.1
NetP14_2: P14.2 R48.2
NetP14_3: P14.3 R47.2
NetQ1_1: Q1.1 Q1.3 Q2.2 R12.2
NetQ1_2: Q1.2 Q1.4 Q2.3 R18.2
NetQ2_1: Q2.1 R12.1 R16.2
NetQ3_1: Q3.1 R19.2 R22.2
NetQ3_3: Q3.3 R16.1
NetQ4_1: Q4.1 R26.2 R28.2
NetQ5_1: Q5.1 R27.2 R29.2
NetQ6_1: Q6.1 R30.2 R31.2
NetQ7_3: Q7.3 R35.1 U4.5
NetQ8_3: Q8.3 R34.1 U4.4
NetQ9_2: Q9.2 R43.1 R55.1 R66.2
NetQ9_3: Q9.3 R44.1 R49.1 R55.2
NetR1_2: R1.2 R2.2 R3.1 U1.6
NetR4_2: R4.2 U1.7
NetR5_2: R5.2 R9.1 R10.2 R11.2
NetR7_2: R7.2 R8.2 U1.5
NetR19_1: R19.1 R64.2
NetR26_1: R26.1 R60.2
NetR27_1: R27.1 R65.2
NetR30_1: R30.1 R61.2
NetR36_1: R36.1 U4.2
NetR39_2: R39.2 U6.4
NetR40_2: R40.2 U6.1
NetR42_2: R42.2 R75.2 R78.2 U6.3
NetR45_2: R45.2 R62.1 U5.11
NetR46_2: R46.2 R59.1 U5.12
NetR59_2: R59.2 R68.1 U5.13
NetR62_2: R62.2 R67.1 U5.14
NetR74_1: R74.1 U6.7
NetR75_1: R75.1 R77.2 U6.2
NetR76_1: R76.1 U6.6
VBATT: DZ2.2 J3.2 P2.2 P5.1 Q1.5 Q1.6 R9.2
pads on no net: D2.2 D3.3 D3.4 DZ4.2 P8.5 U2.6 U2.7 U4.6 U5.7 U5.8 U5.9 U5.10

## Silkscreen, mask and mechanical layers (free items; w line width, h text height)
Drawing:
  circle w0.127: c0,0 r1.55
  circle w0.127: c0,0 r3
  lines w0.127: -4,0 4,0 ; 0,-4 0,4
  text "Mechanical Characteristics" at 2.4,108.5 h5
Assembly_top:
  text "Assembly TOP" at 2.328,108.339 h5
Assembly_bot:
  text "Assembly Bottom" at 39.328,108.339 h5
Note_top:
  text "Note TOP" at 2.328,108.339 h5
Note_bot:
  text "Note Bottom" at 39.228,108.439 h5
PCB_Note:
  text "PCB Note" at 2.6,108.6 h5

## Text inside footprints (layer, text, board x,y; h text height)
C5: Assembly_top "+" at 63.4,42.3 h1 r90; Note_top "+" at 65.4,42.05 h1 r90; Note_top "+" at 64.7,42.05 h1 r90; Top Overlay "+" at 67.5,45.3 h1 r90
C6: Assembly_top "+" at 112.076,17.756 h1 r90; Note_top "+" at 114.076,17.506 h1 r90; Note_top "+" at 113.376,17.506 h1 r90; Top Overlay "+" at 116.176,20.756 h1 r90
D1: Assembly_top "K" at 82.375,8.2 h0.8
D4: Note_top "K" at 124.01,18.656 h1 r90
D5: Note_top "K" at 128.81,18.656 h1 r90
D6: Note_top "K" at 119.21,18.656 h1 r90
DZ1: Note_top "K" at 73.213,17.556 h1 r90
DZ2: Note_top "K" at 80.713,17.556 h1 r90
DZ3: Note_top "K" at 99.7,33.95 h1 r90
J2: Assembly_bot "1" at 11,33.54 h2 r270; Assembly_bot "16" at 13.5,50.94 h2 r270; Drawing "1" at 10.8,32.54 h1 r270; Drawing "2" at 13.3,32.54 h1 r270; Drawing "52" at 14.5,97.4 h1 r270; Drawing "51" at 10.5,97.6 h1 r270; Note_bot "16" at 13.5,50.94 h2 r270; Note_bot "1" at 11,33.54 h2 r270; Bottom Overlay "51" at 10.16,99.09 h2 r270; Bottom Overlay "1" at 10.3,30.94 h2 r270; Bottom Overlay "52" at 13.97,99.09 h2 r270; Bottom Overlay "2" at 14,30.64 h2 r270
J3: Assembly_bot "1" at 3.9,31.94 h2 r270; Assembly_bot "16" at 6.4,49.34 h2 r270; Drawing "1" at 3.7,30.94 h1 r270; Drawing "2" at 6.2,30.94 h1 r270; Drawing "52" at 7.4,95.8 h1 r270; Drawing "51" at 3.4,96 h1 r270; Note_bot "16" at 6.4,49.34 h2 r270; Note_bot "1" at 3.9,31.94 h2 r270; Bottom Overlay "51" at 3.06,97.49 h2 r270; Bottom Overlay "1" at 3.2,29.34 h2 r270; Bottom Overlay "52" at 6.87,97.49 h2 r270; Bottom Overlay "2" at 6.9,29.04 h2 r270
J4: Assembly_bot "1" at 17.1,32.94 h2 r270; Assembly_bot "16" at 19.6,50.34 h2 r270; Drawing "1" at 16.9,31.94 h1 r270; Drawing "2" at 19.4,31.94 h1 r270; Drawing "52" at 20.6,96.8 h1 r270; Drawing "51" at 16.6,97 h1 r270; Note_bot "16" at 19.6,50.34 h2 r270; Note_bot "1" at 17.1,32.94 h2 r270; Bottom Overlay "51" at 16.26,98.49 h2 r270; Bottom Overlay "1" at 16.4,30.34 h2 r270; Bottom Overlay "52" at 20.07,98.49 h2 r270; Bottom Overlay "2" at 20.1,30.04 h2 r270
P13: Top Overlay "9" at 69.135,92.616 h1.5 r90; Top Overlay "10" at 58.135,92.116 h1.5 r90; Top Overlay "1" at 69.135,82.616 h1.5 r90; Top Overlay "2" at 58.135,82.116 h1.5 r90
U5: Note_top "1" at 93.2,65 h1